# Altium PCB PCB1.PcbDoc (part 2 of 2)
Units mm, origin at the board's own origin, x right, y up, seen from the top; angles counter-clockwise.
Board outline 54.2 x 60.2 mm, 4 copper layers (Top Layer, Layer 1, Layer 2, Bottom Layer), stack 1.57 mm thick; 81 components, 54 nets, 273 pads, 297 vias.
Unrouted connection lines stored in the file: 3.
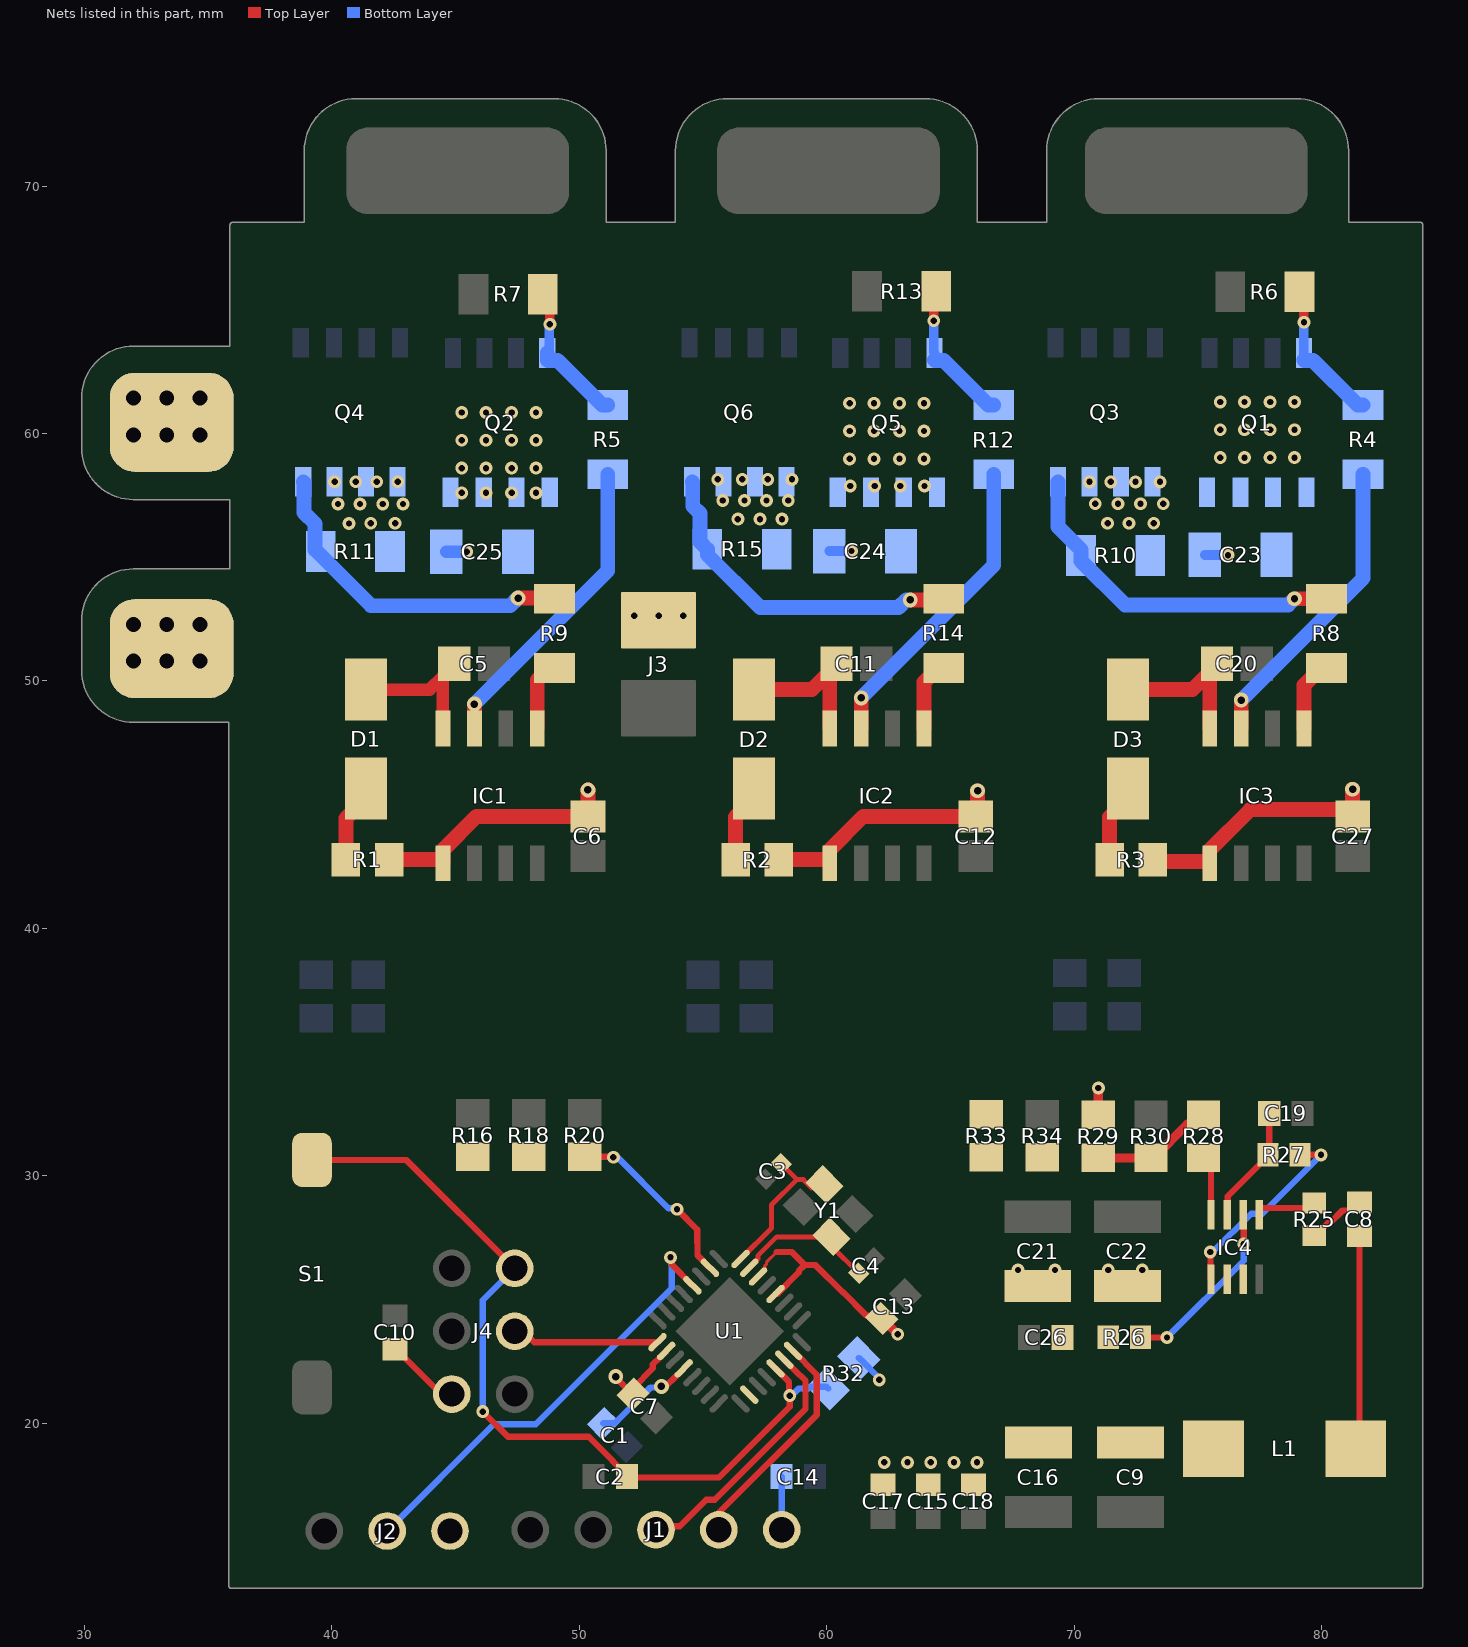
[diagram p4: the nets of this part, all layers, seen from the top]

## Via types
v1: diameter 0.518, hole 0.254, Top Layer to Bottom Layer, 206 vias
v2: diameter 1, hole 0.6, Top Layer to Bottom Layer, 48 vias
v3: diameter 0.518, hole 0.254, Top Layer to Bottom Layer, tented both sides, 20 vias
v4: diameter 0.6, hole 0.3, Top Layer to Bottom Layer, 9 vias
v5: diameter 0.5, hole 0.2, Top Layer to Bottom Layer, 9 vias
v6: diameter 0.6, hole 0.3, Top Layer to Bottom Layer, tented both sides, 5 vias

## Nets (pads, with @x,y where several pads share a name; then routed paths per layer and width w, separated by ;. In a path a pad name is that pad's centre, name@x,y a point inside that pad or via, vN(x,y) a via of type N, cw(c..) or ccw(c..) an arc to the next point about the centre after c; other vN are vias at no path point) (continued)
NetC1_1: C1.1 U1.20 | length 3.7
  Top Layer w0.254: v6(53.32,21.497) 53.501,21.497 U1.20@53.898,21.893
  Bottom Layer w0.254: C1.1@50.973,20.002 51.429,20.002 52.877,21.45 53.274,21.45 v6(53.32,21.497)
NetC5_2: C5.2 D1.2 IC1.8 | length 6.1
  Top Layer w0.5: D1.2@41.375,49.65 43.95,49.65 C5.2@44.49,50.19 ; IC1.8@44.49,48.084 C5.2@44.49,50.19 ; C5.2@44.95,50.7 44.95,50.65 C5.2@44.49,50.19
NetC8_1: C8.1 R25.2 | length 2.4
  Top Layer w0.254: R25.2@79.7,27.6 79.75,27.6 80.244,28.094 80.333,28.094 80.841,28.602 81.202,28.602 C8.1@81.525,28.925
NetC8_2: C8.2 IC4.3 L1.1 | length 8.7
  Top Layer w0.254: L1.1@81.375,18.975 81.525,19.125 C8.2@81.525,27.575
NetC11_2: C11.2 D2.2 IC2.8 | length 6.1
  Top Layer w0.6: D2.2@57.063,49.65 59.4,49.65 C11.2@60.123,50.373 ; IC2.8@60.123,48.084 C11.2@60.123,50.373 ; C11.2@60.4,50.7 60.4,50.65 C11.2@60.123,50.373
NetC19_2: C19.2 IC4.7 R27.1 | length 4.8
  Top Layer w0.254: IC4.7@76.175,28.425 76.198,28.448 76.198,29.173 77.875,30.85 C19.2@77.875,32.525
NetC20_2: C20.2 D3.2 IC3.8 | length 6.3
  Top Layer w0.6: D3.2@72.176,49.65 74.775,49.65 C20.2@75.478,50.353 ; IC3.8@75.478,48.084 C20.2@75.478,50.353 ; C20.2@75.775,50.7 75.775,50.65 C20.2@75.478,50.353
NetD1_1: D1.1 R1.2 | length 3.2
  Top Layer w0.6: R1.2@40.567,42.782 40.567,44.442 41.375,45.25 D1.1@41.375,45.65
NetD2_1: D2.1 R2.2 | length 3.2
  Top Layer w0.6: R2.2@56.315,42.782 56.315,44.502 57.063,45.25 D2.1@57.063,45.65
NetD3_1: D3.1 R3.2 | length 3.2
  Top Layer w0.6: R3.2@71.428,42.782 71.428,44.502 72.176,45.25 D3.1@72.176,45.65
NetQ1_4: Q1.4 R4.2 R6.2 | length 6
  Top Layer w0.381: R6.2@79.1,65.725 79.28,65.545 v1(79.28,64.495)
  Bottom Layer w0.381: Q1.4@79.28,62.975 Q1.4@79.28,63.25 v1(79.28,64.495)
  Bottom Layer w0.6: Q1.4@79.28,62.975 79.305,62.95 79.65,62.95 81.45,61.15 R4.2@81.675,61.15
NetQ2_4: Q2.4 R5.2 R7.2 | length 6.1
  Top Layer w0.381: R7.2@48.525,65.625 48.4,65.5 48.811,65.089 v1(48.811,64.417)
  Bottom Layer w0.381: Q2.4@48.705,63.25 48.785,63.33 48.785,64.354 48.811,64.38 v1(48.811,64.417)
  Bottom Layer w0.6: Q2.4@48.705,63.25 48.705,62.975 48.73,62.95 49.125,62.95 50.925,61.15 R5.2@51.15,61.15
NetQ3_4: Q3.4 R8.2 R10.2 | length 14.3
  Top Layer w0.6: v4(78.9,53.325) R8.2@80.2,53.325
  Bottom Layer w0.6: Q3.4@69.345,58.046 69.345,56.23 70.275,55.3 R10.2@70.275,55.075 70.275,54.85 72.05,53.075 78.65,53.075 v4(78.9,53.325)
NetQ4_4: Q4.4 R9.2 R11.2 | length 13.7
  Top Layer w0.6: v4(47.525,53.35) 48.975,53.35 R9.2@49,53.325
  Bottom Layer w0.6: Q4.4@38.845,58.046 38.87,58.021 38.87,56.805 39.325,56.35 39.325,55.3 41.588,53.037 47.212,53.037 v4(47.525,53.35)
NetQ5_4: Q5.4 R12.2 R13.2 | length 6
  Top Layer w0.381: v1(64.32,64.559) 64.32,65.645 R13.2@64.425,65.75
  Bottom Layer w0.381: v1(64.32,64.559) 64.32,63.285 Q5.4@64.355,63.25 Q5.4@64.355,62.975
  Bottom Layer w0.6: Q5.4@64.355,62.975 64.38,62.95 64.725,62.95 66.525,61.15 R12.2@66.75,61.15
NetQ6_4: Q6.4 R14.2 R15.2 | length 13.8
  Top Layer w0.6: v4(63.375,53.275) 64.675,53.275 R14.2@64.725,53.325
  Bottom Layer w0.6: Q6.4@54.562,58.046 54.587,58.021 54.587,57.063 54.875,56.775 54.875,55.625 R15.2@55.175,55.325 55.175,55.1 57.309,52.966 62.901,52.966 63.21,53.275 v4(63.375,53.275)
NetR4_1: IC3.7 R4.1 | length 12.3
  Top Layer w0.6: IC3.7@76.748,48.084 v4(76.748,49.227)
  Bottom Layer w0.6: v4(76.748,49.227) 81.675,54.154 R4.1@81.675,58.35
NetR5_1: IC1.7 R5.1 | length 12.5
  Top Layer w0.6: IC1.7@45.76,48.084 v4(45.76,49.065)
  Bottom Layer w0.6: v4(45.76,49.065) 51.15,54.455 R5.1@51.15,58.35
NetR8_1: IC3.5 R8.1 | length 3
  Top Layer w0.6: IC3.5@79.288,48.084 79.288,49.838 79.975,50.525 R8.1@80.2,50.525
NetR9_1: IC1.5 R9.1 | length 2.9
  Top Layer w0.6: IC1.5@48.3,48.084 48.3,50.05 48.775,50.525 R9.1@49,50.525
NetR12_1: IC2.7 R12.1 | length 12.5
  Top Layer w0.6: IC2.7@61.393,48.084 v4(61.393,49.318)
  Bottom Layer w0.6: v4(61.393,49.318) 66.75,54.675 R12.1@66.75,58.35
NetR14_1: IC2.5 R14.1 | length 2.9
  Top Layer w0.6: IC2.5@63.933,48.084 63.933,49.958 64.5,50.525 R14.1@64.725,50.525
NetR25_1: IC4.5 R25.1 | length 2.6
  Top Layer w0.254: IC4.5@77.475,28.425 77.475,28.677 77.498,28.7 79.5,28.7 R25.1@79.7,28.9
NetR26_2: IC4.6 R26.2 | length 7.3
  Top Layer w0.254: R26.2@72.675,23.475 v1(73.75,23.475) ; IC4.6@76.825,28.425 76.851,28.399 v1(76.851,27.252)
  Bottom Layer w0.254: v1(73.75,23.475) 76.851,26.576 v1(76.851,27.252)
NetR27_2: IC4.1 R27.2 | length 8.1
  Top Layer w0.254: v1(75.493,26.93) 75.509,26.914 75.509,25.841 IC4.1@75.525,25.825 ; R27.2@79.125,30.85 v1(79.975,30.85)
  Bottom Layer w0.254: v1(75.493,26.93) 75.605,26.93 77.151,28.476 77.601,28.476 v1(79.975,30.85)
NetR28_1: IC4.8 R28.1 | length 2.4
  Top Layer w0.254: R28.1@75.225,30.725 75.525,30.425 IC4.8@75.525,28.425
NetR28_2: R28.2 R29.1 R30.2 | length 5
  Top Layer w0.381: R29.1@70.975,30.725 R30.2@73.1,30.725 73.2,30.725 74.565,32.09 74.84,32.09 R28.2@75.225,32.475
OSC_IN: C3.2 U1.8 Y1.1 | length 6.5
  Top Layer w0.2: U1.8@56.517,26.642 57.765,27.89 57.765,28.828 58.783,29.846 ; C3.2@58.086,30.561 58.783,29.864 58.783,29.846 ; Y1.1@59.909,29.661 59.536,29.661 59.388,29.513 59.054,29.846 58.783,29.846
OSC_OUT: C4.2 U1.7 Y1.3 | length 5.8
  Top Layer w0.2: U1.7@56.87,26.288 56.87,26.302 57.216,26.647 57.216,26.772 57.984,27.539 Y1.3@60.191,27.539 60.191,27.161 C4.2@61.289,26.064
PGND: C23.1 C24.1 C25.1 J3.2 pad.4@33.528,51.308 Q3.1 Q3.2 Q3.3 Q4.1 Q4.2 Q4.3 Q6.1 Q6.2 Q6.3 R10.1 R11.1 R15.1 | length 2.7
  Bottom Layer w0.4: C24.1@60.1,55.25 v1(61,55.25) ; C23.1@75.275,55.1 75.29,55.085 v1(76.213,55.085)
  Bottom Layer w0.5: C25.1@44.625,55.225 v1(45.45,55.225)
  other v1: 52.225,52.638 53.213,52.638 54.202,52.638 40.695,56.365 41.572,56.375 42.558,56.375 71.35,56.375 72.213,56.375 73.212,56.375 56.409,56.539 57.301,56.539 58.194,56.539 40.25,57.147 41.141,57.147 42.056,57.147 42.875,57.147 70.852,57.164 71.766,57.164 72.68,57.164 73.595,57.164 55.794,57.292 56.679,57.292 57.563,57.292 58.447,57.292 40.115,58.046 40.966,58.046 41.816,58.048 42.667,58.046 70.615,58.044 71.478,58.044 72.477,58.044 73.462,58.044 55.598,58.146 56.582,58.146 57.615,58.146 58.598,58.146
  other v2: 31.986,50.8 33.328,50.8 34.671,50.8 31.986,52.285 33.328,52.285 34.671,52.285
PVDD: C6.2 C12.2 C21.2 C22.2 C23.2 C24.2 C25.2 C26.2 C27.2 IC1.1 IC2.1 IC3.1 IC4.2 pad.4@33.528,60.452 Q1.5 Q1.6 Q1.7 Q1.8 Q2.5 Q2.6 Q2.7 Q2.8 Q5.5 Q5.6 Q5.7 Q5.8 R1.1 R2.1 R3.1 R26.1 R33.2 | length 30.9
  Top Layer w0.6: R1.1@42.317,42.782 44.44,42.782 IC1.1@44.49,42.732 ; IC1.1@44.49,42.634 IC1.1@44.49,42.732 ; v4(50.35,45.6) C6.2@50.35,44.527 45.845,44.527 44.49,43.172 IC1.1@44.49,42.732 ; R2.1@58.065,42.782 IC2.1@60.123,42.782 ; IC2.1@60.123,42.634 IC2.1@60.123,42.782 ; v4(66.098,45.562) 66.098,44.599 C12.2@66.025,44.527 61.478,44.527 60.123,43.172 IC2.1@60.123,42.782 ; R3.1@73.178,42.782 73.252,42.708 IC3.1@75.478,42.708 ; IC3.1@75.478,42.634 IC3.1@75.478,42.708 ; v4(81.25,45.625) C27.2@81.25,44.527 80.977,44.8 77.106,44.8 75.478,43.172 IC3.1@75.478,42.708
  other v1: 67.725,26.2 69.225,26.2 71.375,26.2 72.75,26.2 45.25,57.6 46.233,57.6 47.267,57.6 48.25,57.6 60.95,57.875 61.933,57.875 62.967,57.875 63.95,57.875 45.25,58.6 46.233,58.6 47.267,58.6 48.25,58.6 60.925,58.975 61.908,58.975 62.942,58.975 63.925,58.975 75.9,59.025 76.883,59.025 77.917,59.025 78.9,59.025 45.25,59.725 46.233,59.725 47.267,59.725 48.25,59.725 60.925,60.1 61.908,60.1 62.942,60.1 63.925,60.1 75.9,60.15 76.883,60.15 77.917,60.15 78.9,60.15 45.25,60.85 46.233,60.85 47.267,60.85 48.25,60.85 60.925,61.225 61.908,61.225 62.942,61.225 63.925,61.225 75.9,61.275 76.883,61.275 77.917,61.275 78.9,61.275
  other v2: 31.986,59.944 33.328,59.944 34.671,59.944 31.986,61.429 33.328,61.429 34.671,61.429
PWM_IN: J2.2 U1.12 | length 18.3
  Top Layer w0.254: v1(53.682,26.708) 53.733,26.657 53.733,26.421 U1.12@54.572,25.581
  Bottom Layer w0.254: J2.2@42.235,15.65 46.551,19.966 48.239,19.966 53.733,25.459 53.733,26.657 v1(53.682,26.708)
RESET: C2.1 J4.5 R32.1 S1.1 U1.29 | length 34.6
  Top Layer w0.254: S1.1@39.2,30.645 43.01,30.645 J4.5@47.39,26.265 ; v1(46.1,20.475) 47.12,19.455 50.382,19.455 51.352,18.485 51.352,18.473 51.925,17.9 C2.1@51.925,17.85 51.964,17.811 55.636,17.811 58.503,20.678 v1(58.503,21.121) ; U1.29@57.931,22.222 57.931,22.22 58.475,21.676 v1@58.475,21.121
  Bottom Layer w0.254: v1(46.1,20.475) 46.1,24.975 J4.5@47.39,26.265 ; v1(58.503,21.121) 58.574,21.121 58.859,21.406 59.281,21.406 59.352,21.477 59.986,21.477 R32.1@60.056,21.406
RXD: J1.3 U1.30 | length 10.4
  Top Layer w0.254: J1.3@53.1,15.7 53.246,15.846 54.062,15.846 55.135,16.919 55.469,16.919 59.143,20.593 59.143,21.718 58.71,22.15 U1.30@58.285,22.576
SCK: J4.3 U1.17 | length 6
  Top Layer w0.254: J4.3@47.39,23.725 47.734,23.725 48.176,23.283 U1.17@53.158,23.283
TXD: J1.4 U1.31 | length 9.3
  Top Layer w0.254: J1.4@55.64,15.7 55.64,16.383 59.597,20.34 59.597,21.971 U1.31@58.638,22.93
VBAT: R33.1 R34.2 U1.26
VCC: C7.2 C9.2 C10.2 C13.2 C14.2 C15.2 C16.2 C17.1 C18.2 J1.5 J2.3 J4.2 L1.2 R29.2 R32.2 U1.4 U1.6 U1.18 | length 20.3
  Top Layer w0.127: U1.6@57.224,25.935 57.495,26.206 57.495,26.363 57.572,26.44 57.572,26.489 57.579,26.497 57.579,26.531 57.973,26.925
  Top Layer w0.15: 58.875,26.171 58.875,26.25
  Top Layer w0.254: C10.2@42.55,23 42.6,23 44.172,21.428 44.607,21.428 J4.2@44.85,21.185 ; v6(51.472,21.89) 51.472,21.853 52.148,21.177 C7.2@52.173,21.177 52.173,21.423 52.974,22.224 52.974,22.383 53.267,22.676 53.267,22.685 U1.18@53.512,22.93 ; U1.4@57.931,25.228 57.996,25.228 58.875,26.106 58.875,26.171 59.105,26.401 ; 57.973,26.925 58.581,26.925 59.105,26.401 ; v3(62.118,21.76) 62.21,21.76 v3@62.225,21.775 ; C13.2@62.223,24.248 61.766,24.248 61.653,24.36 61.597,24.36 60.659,25.298 60.644,25.298 59.541,26.401 59.105,26.401
  Top Layer w0.381: C13.2@62.223,24.248 v3(62.87,23.6) ; R29.2@70.975,32.475 v1(70.975,33.55)
  Bottom Layer w0.254: C14.2@58.175,17.85 58.18,17.845 J1.5@58.18,15.7 ; R32.2@61.294,22.644 61.306,22.644 62.118,21.832 v3(62.118,21.76)
  other v1: 62.325,18.425 63.262,18.425 64.2,18.425 65.137,18.425 66.075,18.425
VGND: R16.1 R18.1 R20.1 U1.10 | length 7.5
  Top Layer w0.254: R20.1@50.225,30.775 51.357,30.775 v3(51.377,30.755) ; v1(53.95,28.65) 54.767,27.833 54.767,27.325 54.776,27.316 54.776,26.795 55.28,26.291 U1.10@55.28,26.288
  Bottom Layer w0.254: v3(51.377,30.755) 51.545,30.755 53.601,28.699 53.901,28.699 v1(53.95,28.65)
pads on no net: U1.2 U1.19 U1.22 U1.27 U1.28 U1.32

## Polygon pours and split planes (outlines as drawn)
PGND on Top Layer "PGND_L01_P002" (solid, pour order 2): 75.875,54.325 75.875,56.125 75.425,56.575 74.75,56.575 74.75,57.575 73.723,58.602 73.675,58.65 69.7,58.65 68,56.95 59.775,56.95 59.5,57.225 59.5,58.125 58.737,58.887 54.562,58.887 52.35,56.675 44.725,56.675 44.125,56.675 44.125,58.125 43.575,58.675 38.55,58.675 36.85,56.975 36.85,53.275 31.95,53.275 31.5,52.825 31.5,49.55 37.062,49.55 38.962,51.45 44.6,51.45 45.975,52.825 45.975,54.3 75.875,54.3
PVDD on Top Layer "PVDD_L01_P003" (solid, pour order 3): 79.7,57.075 79.7,61.975 79.75,62.025 79.725,62.05 73.425,62.05 73.275,62.2 31.625,62.2 31.375,61.95 31.375,59.1 43.725,59.1 44.525,58.3 44.525,57.075 52.2,57.075 54.425,59.3 60.05,59.3 60.075,59.275 60.075,57.5 60.325,57.25 60.4,57.325 68.025,57.325 68.025,58.4 68.95,59.325 69,59.275 75.025,59.275 75.025,57.4 75.375,57.05 75.4,57.075
BEMF3 on Layer 1 (split plane): 79.164,73.011 79.34,72.981 79.512,72.932 79.677,72.864 79.833,72.777 79.979,72.674 80.112,72.555 80.231,72.422 80.334,72.276 80.421,72.12 80.489,71.955 80.538,71.783 80.568,71.607 80.577,71.445 80.576,71.429 80.576,68.529 80.586,68.43 80.615,68.334 80.662,68.246 80.725,68.168 80.803,68.105 80.834,68.088 80.834,65.716 77.996,62.877 73.7,62.877 73.635,62.869 73.574,62.843 73.522,62.803 73.482,62.751 73.456,62.69 73.448,62.625 73.456,62.56 73.473,62.52 73.473,59.442 69.138,59.442 69.138,68.088 69.169,68.105 69.247,68.168 69.31,68.246 69.357,68.334 69.386,68.43 69.396,68.529 69.396,71.429 69.395,71.445 69.404,71.607 69.434,71.783 69.483,71.955 69.551,72.12 69.638,72.276 69.741,72.422 69.86,72.555 69.993,72.674 70.139,72.777 70.295,72.864 70.46,72.932 70.632,72.981 70.808,73.011 70.97,73.02 70.986,73.019 78.986,73.019 79.002,73.02
GND on Layer 1 (split plane): 83.576,57.527 76.704,57.527 74.864,59.368 74.812,59.408 74.751,59.433 74.686,59.442 73.977,59.442 73.977,62.373 78.1,62.373 78.165,62.381 78.226,62.407 78.278,62.447 81.265,65.433 81.282,65.456 81.305,65.485 81.33,65.546 81.339,65.611 81.339,68.019 83.576,68.019
BEMF2 on Layer 1 (split plane): 64.164,73.011 64.34,72.981 64.512,72.932 64.677,72.864 64.833,72.777 64.979,72.674 65.112,72.555 65.231,72.422 65.334,72.276 65.421,72.12 65.489,71.955 65.538,71.783 65.568,71.607 65.577,71.445 65.576,71.429 65.576,68.529 65.586,68.43 65.615,68.334 65.662,68.246 65.725,68.168 65.803,68.105 65.834,68.088 65.834,64.991 63.696,62.852 58.975,62.852 58.91,62.844 58.849,62.818 58.797,62.778 58.775,62.75 58.748,62.729 58.707,62.677 58.682,62.616 58.674,62.551 58.674,59.436 58.628,59.442 54.69,59.442 54.624,59.433 54.581,59.415 54.563,59.408 54.541,59.391 54.511,59.368 54.138,58.994 54.138,68.088 54.169,68.105 54.247,68.168 54.31,68.246 54.357,68.334 54.386,68.43 54.396,68.529 54.396,71.429 54.395,71.445 54.404,71.607 54.434,71.783 54.483,71.955 54.551,72.12 54.638,72.276 54.741,72.422 54.86,72.555 54.993,72.674 55.139,72.777 55.295,72.864 55.46,72.932 55.632,72.981 55.808,73.011 55.97,73.02 55.986,73.019 63.986,73.019 64.002,73.02
GND on Layer 1 (split plane): 68.633,59.437 68.599,59.433 68.538,59.408 68.486,59.368 66.221,57.102 61.072,57.102 59.178,58.996 59.178,62.348 63.8,62.348 63.865,62.356 63.926,62.382 63.978,62.422 66.265,64.708 66.282,64.731 66.305,64.76 66.33,64.821 66.339,64.886 66.339,68.019 68.633,68.019
GND on Layer 1 (split plane): 53.633,58.49 51.846,56.702 46.129,56.702 43.502,59.329 43.502,62.398 47.75,62.398 47.815,62.406 47.876,62.432 47.928,62.472 51.265,65.808 51.305,65.86 51.33,65.921 51.339,65.986 51.339,68.019 53.633,68.019
BEMF1 on Layer 1 (split plane): 49.164,73.011 49.34,72.981 49.512,72.932 49.677,72.864 49.833,72.777 49.979,72.674 50.112,72.555 50.231,72.422 50.334,72.276 50.421,72.12 50.489,71.955 50.538,71.783 50.568,71.607 50.577,71.445 50.576,71.429 50.576,68.529 50.586,68.43 50.615,68.334 50.662,68.246 50.725,68.168 50.803,68.105 50.834,68.088 50.834,66.091 47.646,62.902 43.25,62.902 43.185,62.894 43.124,62.868 43.072,62.828 43.032,62.776 43.006,62.715 42.998,62.65 42.998,59.442 38.092,59.442 38.092,67.379 38.732,68.019 38.886,68.019 38.985,68.029 39.081,68.058 39.169,68.105 39.247,68.168 39.31,68.246 39.357,68.334 39.386,68.43 39.396,68.529 39.396,71.429 39.395,71.445 39.404,71.607 39.434,71.783 39.483,71.955 39.551,72.12 39.638,72.276 39.741,72.422 39.86,72.555 39.993,72.674 40.139,72.777 40.295,72.864 40.46,72.932 40.632,72.981 40.808,73.011 40.97,73.02 40.986,73.019 48.986,73.019 49.002,73.02
GND on Layer 1 (split plane): 37.661,67.661 37.621,67.609 37.596,67.548 37.587,67.483 37.587,59.294 36.089,57.796 36.081,57.8 35.985,57.829 35.886,57.839 31.986,57.839 31.97,57.838 31.808,57.847 31.632,57.877 31.46,57.926 31.295,57.994 31.139,58.081 30.993,58.184 30.86,58.303 30.741,58.436 30.638,58.582 30.551,58.738 30.483,58.903 30.434,59.075 30.404,59.251 30.395,59.413 30.396,59.429 30.396,61.429 30.395,61.445 30.404,61.607 30.434,61.783 30.483,61.955 30.551,62.12 30.638,62.276 30.741,62.422 30.86,62.555 30.993,62.674 31.139,62.777 31.295,62.864 31.46,62.932 31.632,62.981 31.808,63.011 31.97,63.02 31.986,63.019 35.886,63.019 35.985,63.029 36.081,63.058 36.169,63.105 36.247,63.168 36.31,63.246 36.357,63.334 36.386,63.43 36.396,63.529 36.396,68.019 38.019,68.019
GND on Layer 1 (split plane): 80.991,46.666 81.09,46.58 81.199,46.507 81.316,46.449 81.441,46.407 81.569,46.381 81.7,46.373 83.576,46.373 83.576,13.839 36.351,13.839 36.351,44.123 37.767,44.123 37.898,44.131 38.027,44.157 38.151,44.199 38.268,44.257 38.377,44.33 38.476,44.416 43.557,49.498 78.16,49.498
PGND on Layer 1 (split plane): 58.674,58.892 58.682,58.827 58.707,58.766 58.748,58.714 60.789,56.672 60.812,56.654 60.842,56.632 60.903,56.606 60.968,56.598 66.325,56.598 66.39,56.606 66.451,56.632 66.503,56.672 68.769,58.937 74.581,58.937 76.422,57.097 76.451,57.074 76.474,57.057 76.492,57.049 76.535,57.031 76.6,57.023 83.576,57.023 83.576,48.405 83.495,48.377 82.115,48.377 79.284,51.209 79.185,51.295 79.076,51.368 78.959,51.426 78.834,51.468 78.706,51.494 78.575,51.502 43.142,51.502 43.011,51.494 42.883,51.468 42.759,51.426 42.641,51.368 42.532,51.295 42.434,51.209 37.352,46.127 36.351,46.127 36.351,48.329 36.341,48.428 36.312,48.524 36.265,48.612 36.202,48.69 36.124,48.753 36.036,48.8 35.94,48.829 35.841,48.839 31.986,48.839 31.97,48.838 31.808,48.847 31.632,48.877 31.46,48.926 31.295,48.994 31.139,49.081 30.993,49.184 30.86,49.303 30.741,49.436 30.638,49.582 30.551,49.738 30.483,49.903 30.434,50.075 30.404,50.251 30.395,50.413 30.396,50.429 30.396,52.429 30.395,52.445 30.404,52.607 30.434,52.783 30.483,52.955 30.551,53.12 30.638,53.276 30.741,53.422 30.86,53.555 30.993,53.674 31.139,53.777 31.295,53.864 31.46,53.932 31.632,53.981 31.808,54.011 31.97,54.02 31.986,54.019 35.886,54.019 35.985,54.029 36.081,54.058 36.169,54.105 36.247,54.168 36.31,54.246 36.357,54.334 36.386,54.43 36.396,54.529 36.396,57.329 36.391,57.384 37.944,58.937 43.181,58.937 45.847,56.272 45.899,56.232 45.96,56.206 46.025,56.198 51.95,56.198 52.015,56.206 52.076,56.232 52.128,56.272 54.794,58.937 58.628,58.937 58.674,58.943
no net on Layer 2 (split plane): 221 vertices, not listed, extent 36.396,41.052 83.576,73.02
VCC on Layer 2 (split plane): 83.576,13.839 36.351,13.839 36.351,37.023 75.723,37.023 75.723,34.379 71.897,30.553 71.857,30.501 71.831,30.44 71.823,30.375 71.823,28.329 70.946,27.452 67.1,27.452 67.035,27.444 66.974,27.418 66.922,27.378 66.472,26.928 66.432,26.876 66.406,26.815 66.398,26.75 66.398,24.65 66.406,24.585 66.432,24.524 66.472,24.472 66.772,24.172 66.824,24.132 66.885,24.106 66.95,24.098 73.675,24.098 73.74,24.106 73.801,24.132 73.853,24.172 73.893,24.224 73.919,24.285 73.927,24.35 73.927,26.046 79.603,31.722 79.643,31.774 79.669,31.835 79.677,31.9 79.677,37.421 82.804,40.548 83.576,40.548
no net on Layer 2 (split plane): 46.573,54.596 46.573,45.85 46.581,45.785 46.607,45.724 46.647,45.672 48.572,43.747 48.624,43.707 48.685,43.681 48.75,43.673 72.846,43.673 75.723,40.796 75.723,37.527 36.351,37.527 36.351,48.329 36.341,48.428 36.312,48.524 36.265,48.612 36.202,48.69 36.124,48.753 36.036,48.8 35.94,48.829 35.841,48.839 31.986,48.839 31.97,48.838 31.808,48.847 31.632,48.877 31.46,48.926 31.295,48.994 31.139,49.081 30.993,49.184 30.86,49.303 30.741,49.436 30.638,49.582 30.551,49.738 30.483,49.903 30.434,50.075 30.404,50.251 30.395,50.413 30.396,50.429 30.396,52.429 30.395,52.445 30.404,52.607 30.434,52.783 30.483,52.955 30.551,53.12 30.638,53.276 30.741,53.422 30.86,53.555 30.993,53.674 31.139,53.777 31.295,53.864 31.46,53.932 31.632,53.981 31.808,54.011 31.97,54.02 31.986,54.019 35.886,54.019 35.985,54.029 36.081,54.058 36.169,54.105 36.247,54.168 36.31,54.246 36.357,54.334 36.386,54.43 36.396,54.529 36.396,57.076 44.092,57.076
PVDD on Layer 2 (split plane): 44.222,61.897 44.274,61.857 44.335,61.831 44.4,61.823 48.898,61.823 48.898,57.35 48.906,57.285 48.932,57.224 48.972,57.172 50.122,56.022 50.174,55.982 50.235,55.956 50.3,55.948 59.4,55.948 59.465,55.956 59.526,55.982 59.578,56.022 60.053,56.497 60.093,56.549 60.119,56.61 60.127,56.675 60.127,62.048 64.623,62.048 64.623,57.475 64.631,57.41 64.657,57.349 64.697,57.297 65.547,56.447 65.599,56.407 65.66,56.381 65.725,56.373 74.2,56.373 74.265,56.381 74.326,56.407 74.378,56.447 74.418,56.499 74.444,56.56 74.452,56.625 74.452,61.696 74.854,62.098 82.448,62.098 82.448,40.904 79.247,37.703 79.207,37.651 79.181,37.59 79.173,37.525 79.173,32.004 73.497,26.328 73.457,26.276 73.431,26.215 73.423,26.15 73.423,24.602 67.054,24.602 66.902,24.754 66.902,26.646 67.204,26.948 71.05,26.948 71.115,26.956 71.176,26.982 71.228,27.022 72.253,28.047 72.271,28.069 72.293,28.099 72.319,28.16 72.327,28.225 72.327,30.271 76.153,34.097 76.193,34.149 76.219,34.21 76.227,34.275 76.227,40.9 76.219,40.965 76.201,41.008 76.193,41.026 76.176,41.049 76.153,41.078 73.128,44.103 73.076,44.143 73.015,44.169 72.95,44.177 48.854,44.177 47.077,45.954 47.077,54.7 47.069,54.765 47.043,54.826 47.003,54.878 44.375,57.507 44.322,57.547 44.262,57.572 44.196,57.581 36.327,57.581 36.31,57.612 36.247,57.69 36.169,57.753 36.081,57.8 35.985,57.829 35.886,57.839 31.986,57.839 31.97,57.838 31.808,57.847 31.632,57.877 31.46,57.926 31.295,57.994 31.139,58.081 30.993,58.184 30.86,58.303 30.741,58.436 30.638,58.582 30.551,58.738 30.483,58.903 30.434,59.075 30.404,59.251 30.395,59.413 30.396,59.429 30.396,61.429 30.395,61.445 30.404,61.607 30.434,61.783 30.483,61.955 30.551,62.12 30.638,62.276 30.741,62.422 30.86,62.555 30.993,62.674 31.139,62.777 31.295,62.864 31.46,62.932 31.632,62.981 31.808,63.011 31.97,63.02 31.986,63.019 35.886,63.019 35.985,63.029 36.081,63.058 36.169,63.105 36.247,63.168 36.31,63.246 36.327,63.277 42.841,63.277

## Keep-outs
Keep-Out Layer:
  lines w0.2: 35.986,54.429 35.986,57.429 ; 35.986,54.429 31.986,54.429 ccw(c31.986,52.429) 29.986,52.429 29.986,50.429 ccw(c31.986,50.429) 31.986,48.429 35.941,48.429 35.941,13.429 83.986,13.429 83.986,68.429 80.986,68.429 80.986,71.429 ccw(c78.986,71.429) 78.986,73.429 70.986,73.429 ccw(c70.986,71.429) 68.986,71.429 68.986,68.429 ; 35.986,54.429 35.986,57.429 ; 35.986,57.429 31.986,57.429 cw(c31.986,59.429) 29.986,59.429 29.986,61.429 cw(c31.986,61.429) 31.986,63.429 35.986,63.429 ; 35.986,63.429 35.986,68.429 ; 35.986,63.429 35.986,68.429 ; 35.986,68.429 38.986,68.429 ; 35.986,68.429 38.986,68.429 ; 38.986,68.429 38.986,71.429 cw(c40.986,71.429) 40.986,73.429 48.986,73.429 cw(c48.986,71.429) 50.986,71.429 50.986,68.429 ; 50.986,68.429 53.986,68.429 ; 50.986,68.429 53.986,68.429 ; 53.986,68.429 53.986,71.429 cw(c55.986,71.429) 55.986,73.429 63.986,73.429 cw(c63.986,71.429) 65.986,71.429 65.986,68.429 ; 65.986,68.429 68.986,68.429 ; 65.986,68.429 68.986,68.429

## Other copper
Top Layer:
  region net VGND: 45.05,31.35 50.9,31.35 50.9,30.2 50.875,30.175 45.05,30.175
  region net GND: 61.775,16.625 66.75,16.625 67.2,17.075 73.625,17.075 73.625,15.775 66.725,15.775 66.725,15.3 66.3,14.875 61.775,14.875
  region net GND: 67.175,27.725 73.475,27.725 73.475,29.45 67.175,29.45
  region net PVDD: 76.191,25.674 76.024,25.674 76.024,24.875 74.8,24.875 73.475,26.2 72.575,26.2 72.575,24.963 73.388,24.15 76.325,24.15 76.325,25.675
  region net PVDD: 69.1,23.05 69.1,24.9 67.2,24.9 67.2,26.2 73.475,26.2 73.475,24.9 71.8,24.9 71.8,23.05
  region net VCC: 61.85,17.1 66.3,17.1 66.3,17.625 67.275,18.6 73.675,18.6 74.425,17.85 76.8,17.85 76.8,19.85 76.65,20 76.475,19.825 67.3,19.825 67.3,19.75 66.375,18.825 61.825,18.825 61.825,17.175 61.825,17.15
  region net NetC8_2: 76.975,25.65 76.975,24.55 81.45,20.075 82.5,20.075 82.5,17.875 80.2,17.875 76.675,21.4 76.675,25.65
Bottom Layer:
  region net PGND: 70.3,58.65 70.3,57.025 72.475,54.85 72.475,54.275 73.6,54.275 73.625,54.25 73.675,54.3 73.675,56.725 73.875,56.925 73.875,58.65
  region net PGND: 55.325,58.625 55.325,57.125 57.375,55.075 57.375,54.5 58.55,54.5 58.575,54.525 58.575,57.1 58.915,57.44 58.915,58.625
  region net PGND: 39.8,58.65 39.8,56.825 41.825,54.8 41.825,54.425 43.025,54.425 43.025,56.85 43.15,56.975 43.15,58.625 43.125,58.65
  region net BEMF_Out1: 69.15,37.025 69.15,35.875 72.6,35.875 72.6,37.025
  region net BEMF_Out2: 54.325,36.95 54.325,35.8 57.775,35.8 57.775,36.95
  region net BEMF_Out3: 38.7,36.95 38.7,35.8 42.15,35.8 42.15,36.95
  region: 61.8,16.625
  region: 61.775,15.725
  region net PVDD: 77.475,54.375 77.525,54.325 78.75,54.325 78.75,56.05 79.725,57.025 79.725,62.025 75.025,62.025 75.025,57.025 76.6,57.025 77.475,56.15
  region net PVDD: 62.513,54.438 62.563,54.388 63.788,54.388 63.788,56.112 64.763,57.088 64.763,62.088 60.063,62.088 60.063,57.088 61.637,57.088 62.513,56.212
  region net PVDD: 46.9,54.35 46.95,54.3 48.175,54.3 48.175,56.025 49.15,57 49.15,62 44.45,62 44.45,57 46.025,57 46.9,56.125
  region net BEMF3: 73.6,59.296 73.65,59.346 73.65,62.6 75,62.6 75.075,62.675 75.1,62.65 78.25,62.65 78.25,63.625 77.2,64.675 77.2,66.575 79.233,68.608 79.233,71.775 71.175,71.775 71.15,71.8 70.408,71.058 70.408,64.375 68.9,64.375 68.9,59.296
  region net BEMF2: 58.817,59.296 58.867,59.346 58.867,62.6 60.217,62.6 60.292,62.675 60.317,62.65 63.467,62.65 63.467,63.625 62.417,64.675 62.417,66.575 64.45,68.608 64.45,71.775 56.392,71.775 56.367,71.8 55.625,71.058 55.625,64.375 54.117,64.375 54.117,59.296
  region net BEMF1: 43.1,59.296 43.15,59.346 43.15,62.6 44.5,62.6 44.575,62.675 44.6,62.65 47.75,62.65 47.75,63.625 46.7,64.675 46.725,64.7 46.725,66.6 49.55,69.425 49.55,71.775 40.675,71.775 40.65,71.8 40.55,71.7 40.55,64.375 38.4,64.375 38.4,59.296
Layer 1 (plane layer: these items are gaps in the copper):
  lines w0.2: 35.886,57.329 35.979,57.329 ; 58.926,62.551 58.975,62.6 ; 73.7,62.625 73.725,62.6
  lines w0.5: 35.979,57.329 37.839,59.189 ; 38.886,68.529 37.839,67.483 37.839,59.189 ; 43.25,59.225 43.25,62.65 47.75,62.65 51.086,65.986 51.086,68.329 ; 53.886,58.45 53.886,68.529 ; 58.628,59.19 54.69,59.19 51.95,56.45 46.025,56.45 43.286,59.189 37.839,59.189 ; 58.926,62.551 58.926,58.892 60.968,56.85 66.325,56.85 68.664,59.189 74.45,59.189 74.686,59.189 76.6,57.275 84.225,57.275 ; 58.975,62.6 63.8,62.6 66.086,64.886 66.086,68.529 ; 68.886,59.211 68.886,68.529 ; 73.7,62.625 78.1,62.625 81.086,65.611 81.086,68.529 ; 73.725,59.2 73.725,62.6
  lines w2: 36.35,45.125 37.767,45.125 43.142,50.5 78.575,50.5 81.7,47.375 83.8,47.375 83.875,47.45
Layer 2 (plane layer: these items are gaps in the copper):
  lines w0.2: 49.075,62.075 49.15,62 ; 59.825,62.3 59.875,62.25 ; 64.7,62.3 64.875,62.125 ; 82.625,62.35 82.7,62.275
  lines w0.5: 35.886,57.329 44.196,57.329 46.825,54.7 46.825,45.85 48.75,43.925 72.95,43.925 75.975,40.9 75.975,34.275 72.075,30.375 72.075,28.225 71.05,27.2 67.1,27.2 66.65,26.75 66.65,24.65 66.95,24.35 73.675,24.35 73.675,26.15 79.425,31.9 79.425,37.525 82.7,40.8 ; 35.886,63.529 42.946,63.529 44.4,62.075 49.075,62.075 ; 36.075,37.275 75.95,37.275 ; 49.15,62 49.15,57.35 50.3,56.2 59.4,56.2 59.875,56.675 59.875,62.25 ; 59.825,62.3 64.7,62.3 ; 64.875,62.125 64.875,57.475 65.725,56.625 73.925,56.625 74.2,56.625 74.2,61.8 74.75,62.35 82.625,62.35 ; 82.7,62.275 82.7,40.8 ; 83.857,40.8 82.7,40.8

## Dimensions
83.986,68.429 to 83.986,13.429 on Top Overlay
35.941,13.429 to 83.986,13.429 on Top Overlay